# EAGLE board afb_r002 (EAGLE 9.6.2)
REV: B
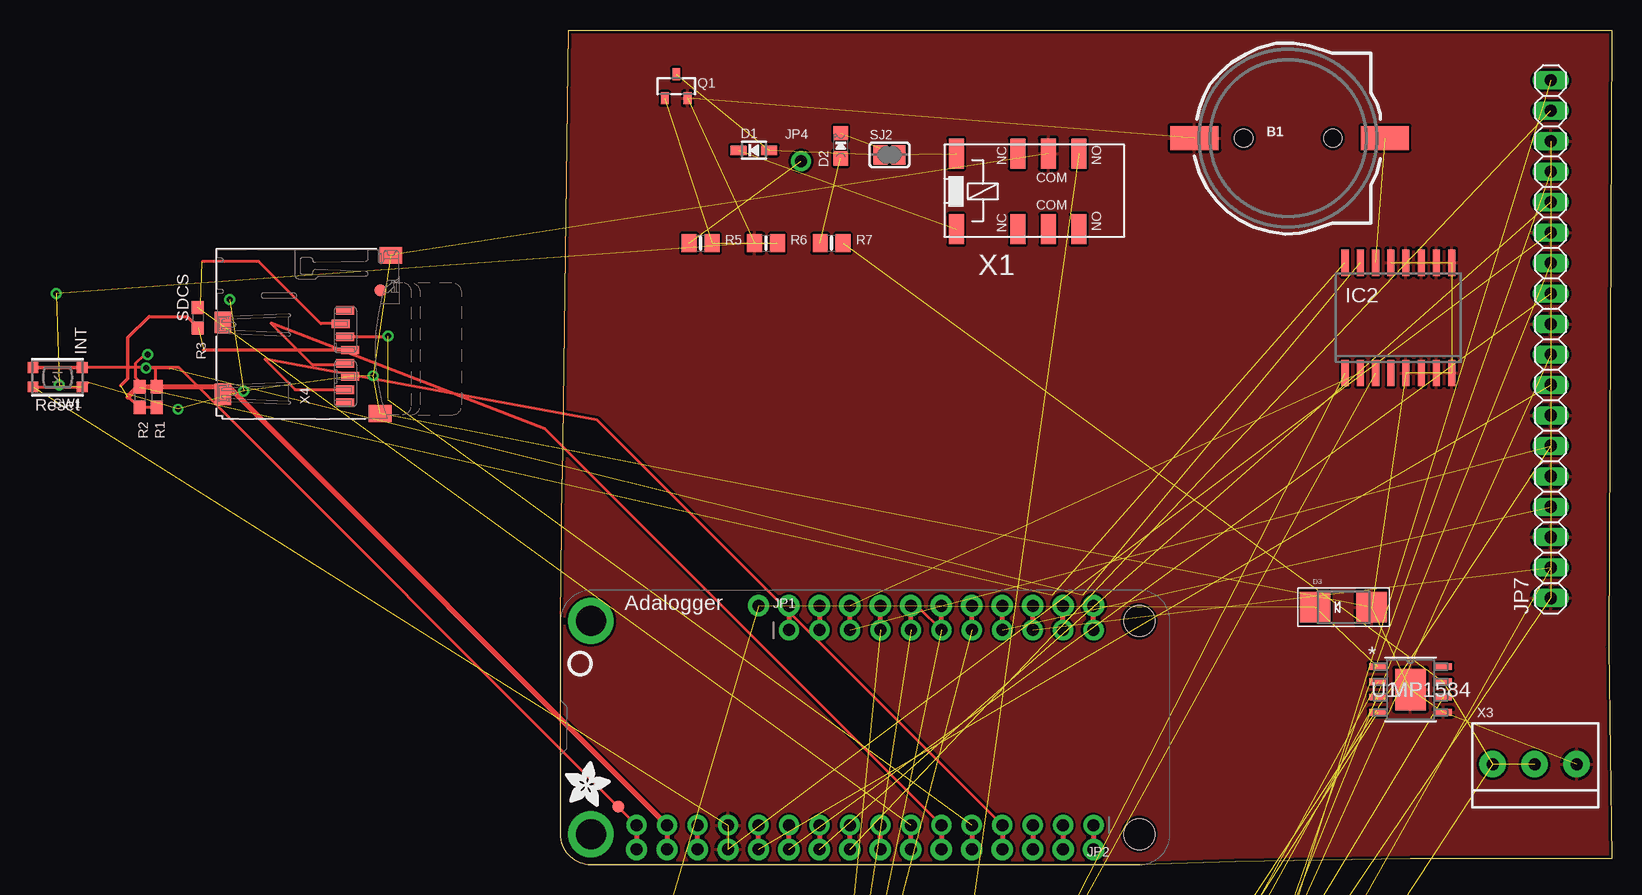
[diagram p0: board, top side]
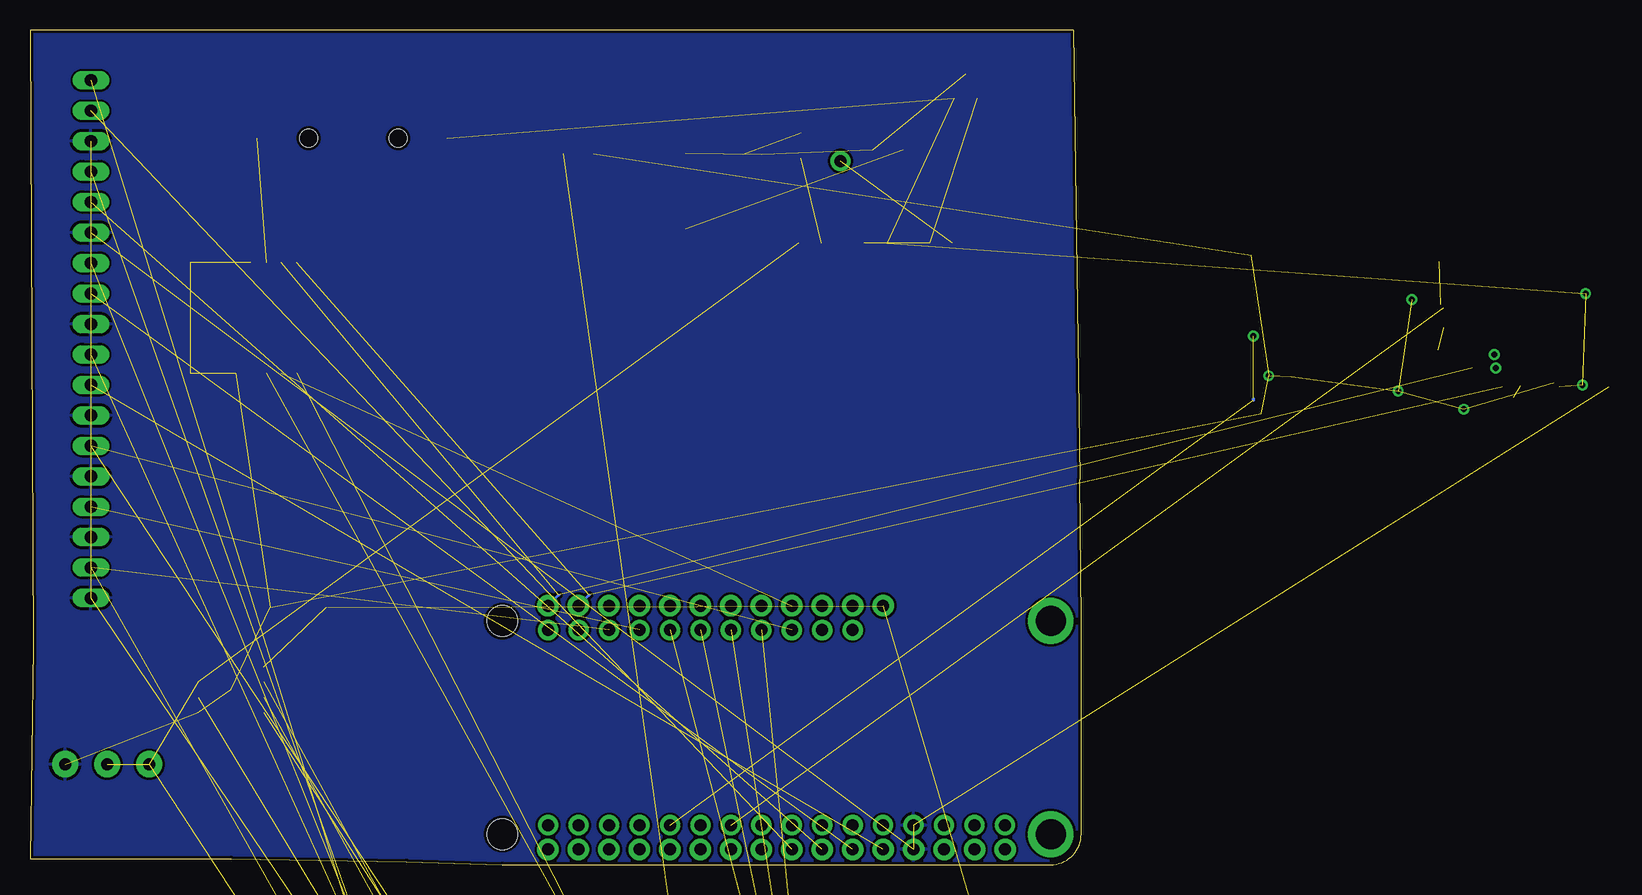
[diagram p1: board, bottom side, seen from below]

Size 87.63 x 69.6 mm. Coordinates in mm from the lower left corner, seen from the top.
Outline: 0.64,69.6 87.63,69.6 87.38,18.16 87.63,0.51 70.87,0.51 56.26,0.25 48.26,0 2.54,0 arc-90 0,2.54 0,20.32 0.13,32.13 0.64,69.6
Copper layers (1*16): Top 0.035mm / dielectric 1.5mm / Bottom 0.035mm
Design rules "adafruit *": minimum track width 8mil, minimum drill 15.5mil, track to track 8mil, track to pad 8mil, pad to pad 8mil, via to via 8mil, smd to smd 8mil, copper to edge 10mil, drill to drill 8mil, minimum pad ring 10mil, minimum via ring 8mil, stop-mask expansion 2mil, vias tented up to drill 20mil, thermal gap 10mil
Net classes: 1 HV: width 0.406 mm, drill 0.381 mm, clearance 1.016 mm

## Footprints (pad centres in the part's own frame; a part is rotated, then mirrored left to right if it is on the bottom)
CR1220-2 = smd 4 x 2: + 8.29,0; - -7.6,0 | hole 1.5: 3.95,0; -3.5,0
C0805 = smd 1.3 x 1.5: 1 -0.85,0; 2 0.85,0
SOD-323 = smd 1.35 x 0.8: A 1.27,0; C -1.27,0
CHIPLED_0805_NOOUTLINE = smd 1.2 x 1.2: A 0,-1.05; C 0,1.05
SMADIODE = smd 2.54 x 2.54: A 2.349,0; C -2.349,0
FIDUCIAL_1MM = smd 1 x 1: 1 0,0
SO16W = smd 0.6 x 2.2: 1 -4.445,-4.6; 2 -3.175,-4.6; 3 -1.905,-4.6; 4 -0.635,-4.6; 5 0.635,-4.6; 6 1.905,-4.6; 7 3.175,-4.6; 8 4.445,-4.6; 9 4.445,4.6; 10 3.175,4.6; 11 1.905,4.6; 12 0.635,4.6; 13 -0.635,4.6; 14 -1.905,4.6; 15 -3.175,4.6; 16 -4.445,4.6
1X11_ROUND = drill 1 pad 1.676: 1 -12.7,0; 2 -10.16,0; 3 -7.62,0; 4 -5.08,0; 5 -2.54,0; 6 0,0; 7 2.54,0; 8 5.08,0; 9 7.62,0; 10 10.16,0; 11 12.7,0
1X16_ROUND = drill 1 pad 1.676: 1 -19.05,0; 2 -16.51,0; 3 -13.97,0; 4 -11.43,0; 5 -8.89,0; 6 -6.35,0; 7 -3.81,0; 8 -1.27,0; 9 1.27,0; 10 3.81,0; 11 6.35,0; 12 8.89,0; 13 11.43,0; 14 13.97,0; 15 16.51,0; 16 19.05,0
1X12-CB = drill 1.016 pad 1.778: 1 -13.97,0; 2 -11.43,0; 3 -8.89,0; 4 -6.35,0; 5 -3.81,0; 6 -1.27,0; 7 1.27,0; 8 3.81,0; 9 6.35,0; 10 8.89,0; 11 11.43,0; 12 13.97,0
1X01_ROUND = drill 1 pad 1.676: 1 0,0
1X18 = drill 1.016 long: 1 -21.59,0; 2 -19.05,0; 3 -16.51,0; 4 -13.97,0; 5 -11.43,0; 6 -8.89,0; 7 -6.35,0; 8 -3.81,0; 9 -1.27,0; 10 1.27,0; 11 3.81,0; 12 6.35,0; 13 8.89,0; 14 11.43,0; 15 13.97,0; 16 16.51,0; 17 19.05,0; 18 21.59,0
L3225M = smd 1.6 x 2.2: 1 -1.4,0; 2 1.4,0
FEATHERWING_NODIM = drill 1 pad 1.778: 1 6.35,1.27; 2 8.89,1.27; 3 11.43,1.27; 4 13.97,1.27; 5 16.51,1.27; 6 19.05,1.27; 7 21.59,1.27; 8 24.13,1.27; 9 26.67,1.27; 10 29.21,1.27; 11 31.75,1.27; 12 34.29,1.27; 13 36.83,1.27; 14 39.37,1.27; 15 41.91,1.27; 16 44.45,1.27; 17 44.45,21.59; 18 41.91,21.59; 19 39.37,21.59; 20 36.83,21.59; 21 34.29,21.59; 22 31.75,21.59; 23 29.21,21.59; 24 26.67,21.59; 25 24.13,21.59; 26 21.59,21.59; 27 19.05,21.59; 28 16.51,21.59 | drill 2.5 pad 3.81: P$1 2.54,20.32; P$2 2.54,2.54 | hole 2.54: 48.26,20.32; 48.26,2.54
SOT23-R = smd 0.635 x 1.016: 1 -0.95,-1; 2 0.95,-1; 3 0,1
0603-NO = smd 1.1 x 1: 1 -0.85,0; 2 0.85,0
R0805 = smd 1.1 x 1.4: 1 -1,0; 2 1,0
0805-NO = smd 1.24 x 1.5: 1 -0.95,0; 2 0.95,0
SOLDERJUMPER_CLOSEDWIRE = smd 1.168 x 1.6: 1 -0.762,0; 2 0.762,0 | smd 0.635 x 0.203: WIRE 0,0
BTN_KMR2_4.6X2.8 = smd 0.9 x 0.9: A 2.05,0.8; A' -2.05,0.8; B 2.05,-0.8; B' -2.05,-0.8
SOIC8E_MPS = smd 1.46 x 0.559: 1 -2.724,1.905; 2 -2.724,0.635; 3 -2.724,-0.635; 4 -2.724,-1.905; 5 2.724,-1.905; 6 2.724,-0.635; 7 2.724,0.635; 8 2.724,1.905 | smd 2.565 x 3.454: EPAD 0,0
RELAY_EE2_NOLATCH = smd 1.25 x 2.5: 1 -6.5,-3.15; 3 -1.37,-3.15; 4 1.17,-3.15; 5 3.71,-3.15; 8 3.71,3.15; 9 1.17,3.15; 10 -1.37,3.15; 12 -6.5,3.15
TERMBLOCK_1X3-3.5MM = drill 1 pad 2.184: 1 3.55,0; 2 0.05,0; 3 -3.45,0
MICROSD = smd 0.7 x 1.5: 1 9,-10.64; 2 7.9,-10.24; 3 6.8,-10.64; 4 5.7,-11.04; 5 4.6,-10.64; 6 3.5,-11.04; 7 2.4,-10.64; 8 1.3,-10.64 | smd 1.8 x 1.4: CD1 2,-0.44; CD2 8,-0.44 | smd 1.4 x 1.9: MT1 0.4,-13.54; MT2 13.6,-14.44

## Placement (x,y rotation side)
B1  cr1220  [CR1220-2]  60.45,60.58 0 top
C3  [C0805]  -17.14,-142.37 0 top  (outside the outline)
C4  [C0805]  -17.14,-154.18 0 top  (outside the outline)
C5  [C0805]  -17.14,-146.3 0 top  (outside the outline)
C6  [C0805]  -17.14,-162.05 0 top  (outside the outline)
C7  [C0805]  -17.14,-158.12 0 top  (outside the outline)
C8  [C0805]  -17.14,-150.24 0 top  (outside the outline)
D1  1N4148  [SOD-323]  16.13,59.56 0 top
D2  RED  [CHIPLED_0805_NOOUTLINE]  23.37,59.94 0 top
D3  [SMADIODE]  65.28,21.46 0 top
FID1  FIDUCIAL_1MM  [FIDUCIAL_1MM]  -14.99,47.88 0 top  (outside the outline)
FID2  FIDUCIAL_1MM  [FIDUCIAL_1MM]  4.83,4.83 0 top
IC2  DS3231/SO  [SO16W]  69.85,45.59 0 top
JP1  [1X11_ROUND]  31.75,19.56 0 top
JP2  [1X16_ROUND]  25.4,3.3 180 top
JP3  [1X12-CB]  -3.3,-166.75 0 top  (outside the outline)
JP4  [1X01_ROUND]  20.07,58.67 0 top
JP5  [1X12-CB]  -3.3,-171.45 0 top  (outside the outline)
JP6  [1X01_ROUND]  -22.23,-168.78 0 top  (outside the outline)
JP7  [1X18]  82.55,43.81 90 top
L2  [L3225M]  -5.71,-49.02 0 top  (outside the outline)
MS1  FEATHERWING_NODIM  [FEATHERWING_NODIM]  0,0 0 top
Q1  MMBT2222  [SOT23-R]  9.65,64.9 0 top
R1  10K  [0603-NO]  -33.66,38.99 270 top  (outside the outline)
R2  10K  [0603-NO]  -35.05,38.99 270 top  (outside the outline)
R3  100K  [0603-NO]  -30.23,45.59 270 top  (outside the outline)
R4  [R0805]  -17.14,-114.81 0 top  (outside the outline)
R5  1K  [0805-NO]  11.68,51.82 0 top
R6  10K  [0805-NO]  17.14,51.82 0 top
R7  10K  [0805-NO]  22.61,51.82 0 top
R8  [R0805]  -17.14,-130.56 0 top  (outside the outline)
R9  [R0805]  -17.14,-134.49 0 top  (outside the outline)
R10  [R0805]  -17.14,-126.62 0 top  (outside the outline)
R11  [R0805]  -17.14,-138.43 0 top  (outside the outline)
R13  [R0805]  -17.14,-118.75 0 top  (outside the outline)
R15  [R0805]  -17.14,-122.68 0 top  (outside the outline)
SJ2  [SOLDERJUMPER_CLOSEDWIRE]  27.43,59.18 0 top
SW1  KMR2  [BTN_KMR2_4.6X2.8]  -41.91,40.64 180 top  (outside the outline)
U1  MP1584  [SOIC8E_MPS]  70.87,14.61 0 top
U$4  [ADAFRUIT_3.5MM]  0.38,4.83 0 top
U$5  [PCBFEAT-REV-040]  1.65,16.76 0 top
X1  RELAY_NONLATCHING-EE2NUH  [RELAY_EE2_NOLATCH]  39.5,56.13 0 top
X3  [TERMBLOCK_1X3-3.5MM]  81.15,8.38 0 top
X4  microsd  [MICROSD]  -28.57,37.21 90 top  (outside the outline)

## Library data of the parts
B1 D1 D2 JP1 JP2 JP4 JP6 MS1 Q1 R1-R3 R5-R7 SJ2 SW1 U$4 U$5 X1 X3 X4 = microbuilder
C3-C8 D3 JP3 JP5 JP7 R4 R8-R11 R13 R15 = adafruit
FID1 FID2 = microbuilder; BOM: EXCLUDE
IC2 = DS3231; AVAILABILITY: Unavailable; DESCRIPTION: Real Time Clock (RTC) IC Clock/Calendar I²C, 2-Wire Serial 16-SOIC (0.295, 7.50mm Width); MF: Maxim Integrated; MP: DS3231; PACKAGE: SOIC-16 Maxim Integrated; PRICE: None
L2 = rcl; SPICEPREFIX: L
U1 = MP1584; BUILT_BY: EMA_Cory; COPYRIGHT: Copyright (C) 2018 Accelerated Designs. All rights reserved; DATASHEET: https://www.monolithicpower.com/en/documentview/productdocument/index/version/2/document_type/Datasheet/lang/en/sku/MP1584/document_id/204; MANUFACTURER_PART_NUMBER: MP1584; SOURCELIBRARY: MPS_2020-01-27; VENDOR: Monolithic Power Systems Inc

## Nets
3.3V: D1.C X1.1
4V: C4.1 C7.1 D3.C L2.1 L2.2 MS1.28 R15.2 U1.1
32K: IC2.1 R13.2
+3V3: JP2.15 MS1.2 R1.2 R2.2 R3.2 X4.4
A0: JP2.12 JP7.8 MS1.5
A1: JP2.11 JP7.11 MS1.6
A2: JP2.10 JP7.14 MS1.7
A3: JP2.9 JP7.17 MS1.8
A4: JP2.8 MS1.9
AREF: JP2.14 MS1.3
BSC: C7.2
CMC: C3.1 C5.1 U1.3
D2: C8.2 JP1.9 JP7.2 MS1.19
D3: JP1.8 JP7.4 MS1.20
D4: JP1.7 JP3.2 JP6.1 MS1.21
D5: JP1.6 JP3.5 MS1.22
D6: JP1.5 JP3.8 MS1.23
D7: JP1.4 JP3.11 MS1.24
D8: IC2.2 JP1.3 JP7.6 MS1.25 R4.2 R13.1
EN: JP1.1 MS1.27
ENC: R11.2 U1.2
G: JP2.1 MS1.16
GND: B1.- C3.2 C4.2 C8.1 D3.A IC2.5 IC2.6 IC2.7 IC2.8 IC2.9 IC2.10 IC2.11 IC2.12 IC2.13 JP2.13 JP7.1 JP7.3 JP7.5 JP7.7 JP7.10 JP7.13 JP7.16 MS1.4 Q1.2 R6.1 R8.1 R9.1 R10.1 SW1.A SW1.A' U1.5 U1.EPAD X1.9 X3.1 X4.6 X4.MT1 X4.MT2
MISO: JP2.4 MS1.13 X4.7
MOSI: JP2.5 MS1.12 X4.3
N$1: B1.+ IC2.14
N$2: D1.A Q1.3 SJ2.1 X1.12
N$3: R8.2 R15.1 U1.4
N$4: C5.2 R10.2
N$5: C6.1 R7.2 R11.1 U1.7 X3.2 X3.3
N$8: IC2.3 R4.1
N$10: R9.2 U1.6
N$11: U1.8
N$22: Q1.1 R5.2 R6.2
N$24: JP4.1 R5.1
N$25: D2.C SJ2.2
N$26: D2.A R7.1
NO1 [HV]: JP5.3 JP5.6 JP5.9 JP5.12 X1.8
P0: JP3.3 JP7.9
P1: JP3.6 JP7.12
P2: JP3.9 JP7.15
P3: JP3.12 JP7.18
RESET: JP2.16 MS1.1 SW1.B SW1.B'
RX: JP2.3 MS1.14
SCK: JP2.6 MS1.11 X4.5
SCL: IC2.16 JP1.10 MS1.18 R2.1
SD_CS: JP2.7 MS1.10 R3.1 X4.2
SDA: IC2.15 JP1.11 MS1.17 R1.1
TX: JP2.2 MS1.15
USB: JP1.2 MS1.26

## Tracks (layer width: path | path; a pad name or v marks a point on that pad's centre or on a via)
3.3V  (1 unrouted)
4V  (7 unrouted)
32K  (1 unrouted)
+3V3  (3 unrouted)
  Top 0.254: -35.08,38.11 -35.49,38.51 -36.03,38.99 | R2.2 R1.2 | -34.29,45.72 -31.11,45.72 | -30.61,45.21 -30.57,45.21
  Top 0.305: -34.29,45.72 -36.07,43.94 -36.07,40.51 -36.64,39.94 | -31.11,45.72 -30.61,45.21 | -30.57,45.21 -30.19,44.77 | -29.74,42.91 X4.4
  Top 0.406: MS1.2 JP2.15 -27.62,39.81 -35.24,39.81 -36.07,38.99
A0  (1 unrouted)
  Top 0.406: MS1.5 JP2.12
A1  (1 unrouted)
  Top 0.406: MS1.6 JP2.11
A2  (1 unrouted)
  Top 0.406: JP2.10 MS1.7
A3  (1 unrouted)
  Top 0.406: MS1.8 JP2.9
A4
  Top 0.406: MS1.9 JP2.8
AREF
  Top 0.406: MS1.3 JP2.14
CMC  (2 unrouted)
D2  (2 unrouted)
  Top 0.406: JP1.9 MS1.19
D3  (1 unrouted)
  Top 0.406: JP1.8 MS1.20
D4  (2 unrouted)
  Top 0.406: JP1.7 MS1.21
D5  (1 unrouted)
  Top 0.254: JP1.6 29.97,21.34
  Top 0.406: JP1.6 MS1.22
D6  (1 unrouted)
  Top 0.406: JP1.5 MS1.23
D7  (1 unrouted)
  Top 0.406: JP1.4 MS1.24
D8  (4 unrouted)
  Top 0.406: JP1.3 MS1.25
EN
  Top 0.406: MS1.27 JP1.1
ENC  (1 unrouted)
G
  Top 0.406: JP2.1 MS1.16
GND  (via drill 0.5)  (41 unrouted)
  Top 0.254: SW1.A SW1.A' | -39.8,39.78 -39.38,40.2
  other vias: -42.04,47.62 -15.62,40.77 -27.56,47.12 -41.78,40.01 -26.42,39.5 -31.88,37.97
  pour Top: 0,70.1 0,0 88.01,0 88.01,70.1
  pour Bottom: 0,69.98 0,0 88.14,0 88.14,69.98
MISO
  Top 0.254: X4.7 -22.11,39.61 -24.64,42.14 3.05,37.08 JP2.4
  Top 0.406: JP2.4 MS1.13
MOSI  (via drill 0.5)  (2 unrouted)
  Top 0.254: v-14.35,44.07 -14.41,44.01 X4.3
  Top 0.406: JP2.5 MS1.12
  Bottom 0.254: -14.35,38.73 -14.35,38.86
N$1  (1 unrouted)
N$2  (3 unrouted)
N$3  (2 unrouted)
N$4  (1 unrouted)
N$5  (5 unrouted)
N$8  (1 unrouted)
N$10  (1 unrouted)
N$22  (2 unrouted)
N$24  (1 unrouted)
N$25  (1 unrouted)
N$26  (1 unrouted)
NO1  (4 unrouted)
P0  (1 unrouted)
P1  (1 unrouted)
P2  (1 unrouted)
P3  (1 unrouted)
RESET
  Top 0.254: SW1.B' SW1.B -31.79,41.44 JP2.16
  Top 0.406: JP2.16 MS1.1
RX
  Top 0.406: JP2.3 MS1.14
SCK
  Top 0.254: JP2.6 -1.27,36.32 -24.13,45.15 -20.7,41.71 -18.03,41.71 X4.5
  Top 0.406: JP2.6 MS1.11
SCL  (via drill 0.5)  (2 unrouted)
  Top 0.254: v-34.42,42.55 -34.67,42.55 -35.43,41.78 -35.43,40.64 -35.18,40.39 -35.12,39.84
  Top 0.406: JP1.10 MS1.18
  Bottom 0.254: 41.02,22.48 MS1.18
SD_CS  (2 unrouted)
  Top 0.254: X4.2 -19.96,45.11 -25.15,50.29 -29.84,50.29 | R3.1 -29.97,46.7
  Top 0.406: MS1.10 JP2.7
SDA  (via drill 0.5)  (2 unrouted)
  Top 0.254: -32.58,41.4 v-34.54,41.4 | -33.72,39.84 -33.72,41.4
  Top 0.406: JP1.11 MS1.17
  Bottom 0.254: 43.56,22.48 MS1.17
TX
  Top 0.406: JP2.2 MS1.15
USB
  Top 0.406: MS1.26 JP1.2

## Text on the board
tPlace: SDCS | INT | Reset | Adalogger